# Altium PCB PCB.PcbDoc
Units mm, origin at the board's own origin, x right, y up, seen from the top; angles counter-clockwise.
Board outline 27.3 x 14 mm, 2 copper layers (Top Layer, Bottom Layer), stack 1.571 mm thick; 7 components, 7 nets, 32 pads, 9 vias.
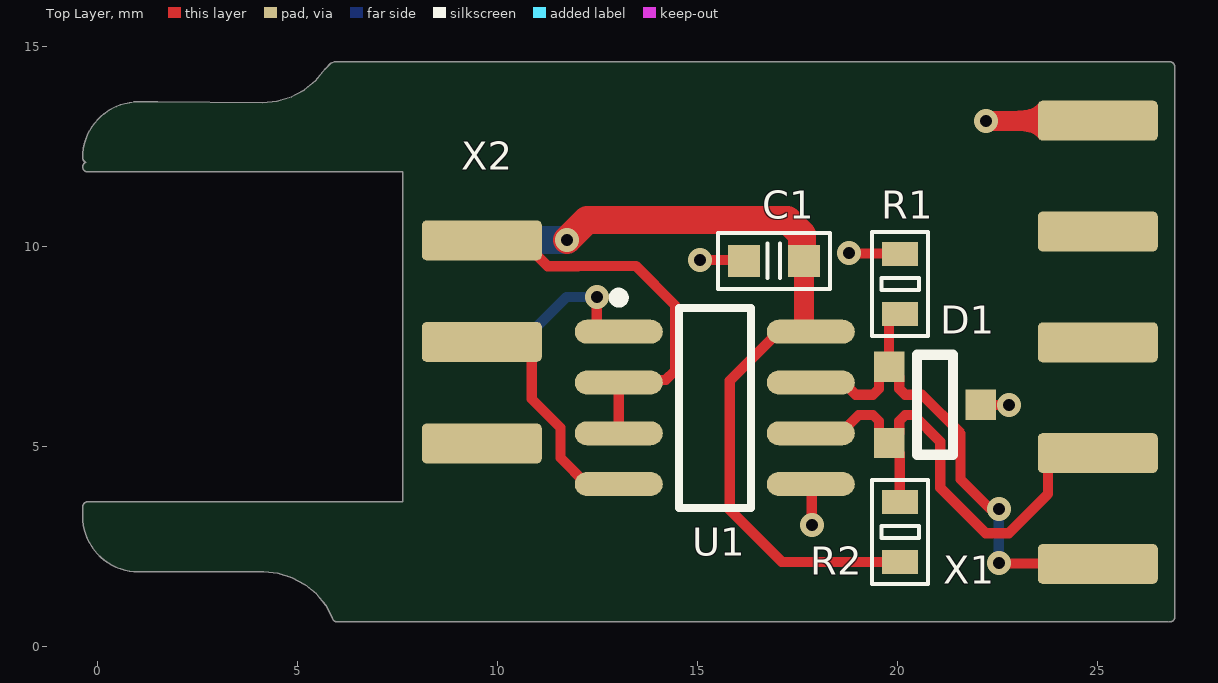
[diagram p0: Top Layer view]
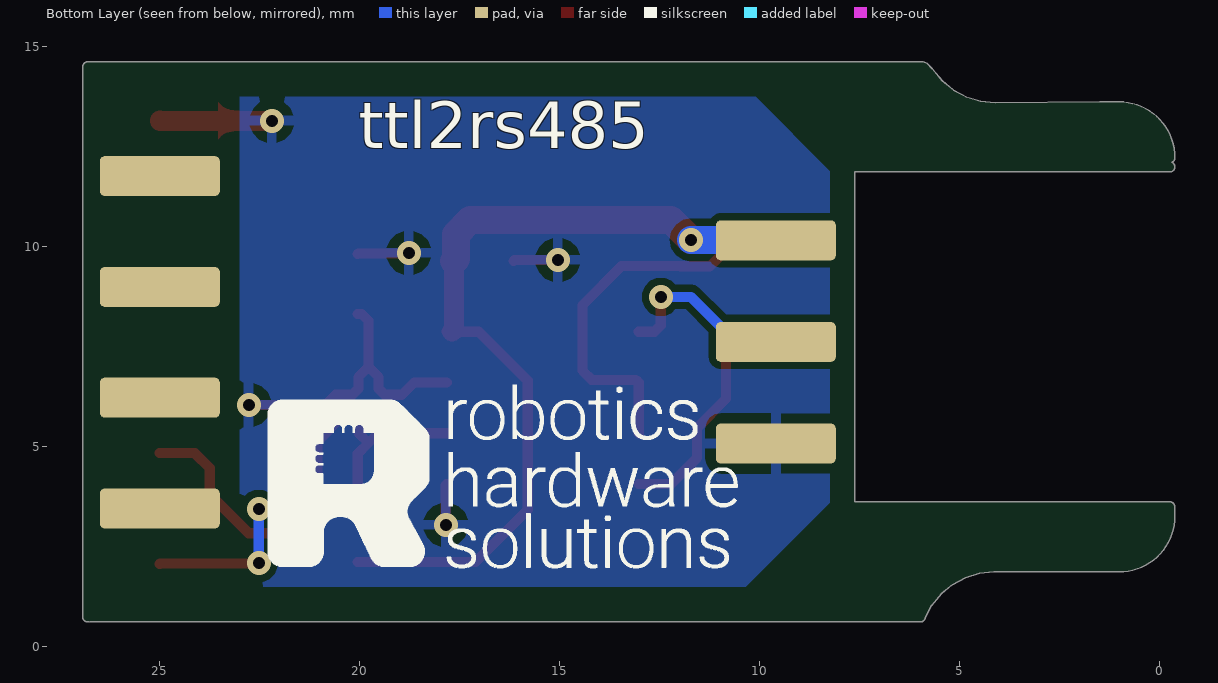
[diagram p1: Bottom Layer view, seen from below]

## Layer stack, top to bottom
Top Solder: solder mask 0.0102, Solder Resist, Dk 3.5
Top Layer: signal copper 0.0356
Dielectric 1: dielectric 1.5, FR-4, Dk 4.8
Bottom Layer: signal copper 0.0356
Bottom Solder: solder mask 0.0102, Solder Resist, Dk 3.5

## Board outline
-0.377,3.27 ccw(c1.02,3.27) 1.02,1.873 4.141,1.873 4.15,1.873 4.506,1.838 4.857,1.731 5.181,1.558 5.465,1.326 5.698,1.042 5.863,0.733 ccw(c5.989,0.75) 5.989,0.623 26.75,0.623 26.775,0.625 ccw(c26.8,0.75) 26.927,0.75 26.927,14.5 ccw(c26.8,14.5) 26.8,14.627 5.913,14.627 5.823,14.59 5.689,14.456 5.68,14.446 5.44,14.153 5.156,13.92 4.833,13.747 4.481,13.641 4.11,13.604 1.501,13.627 1.5,13.627 1.02,13.627 ccw(c1.02,12.23) -0.377,12.23 ccw(c-0.25,12.23) -0.305,12.115 ccw(c-0.25,12) -0.25,11.873 7.623,11.873 7.623,3.627 -0.25,3.627 ccw(c-0.25,3.5) -0.377,3.5

## Design rules (kind name [scope] priority, off if disabled: settings)
Clearance [All] p1: gap=0.18 ignorepadtopadclearanceinfootprint=FALSE
DiffPairsRouting [All] p1: maxlimit=0.254 minlimit=0.254 mostfreqgap=0.254 toplayer_minwidth=0.254 toplayer_maxwidth=0.381 toplayer_prefwidth=0.381 bottomlayer_minwidth=0.254 bottomlayer_maxwidth=0.381 bottomlayer_prefwidth=0.381 maxuncoupledlength=12.7
PolygonConnect [All] p1: connectstyle=Relief reliefconductorwidth=0.254 reliefentries=4 polygonreliefangle="90 Angle" airgapwidth=0.254
RoutingVias [All] p1: holewidth=0.3 width=0.6 viastyle="Through Hole" minholewidth=0.3 minwidth=0.6 maxholewidth=2 maxwidth=4
SolderMaskExpansion [All] p1: expansion=0.102 istentingtop=FALSE
Width [All] p1: maxlimit=2 minlimit=0.254 preferedwidth=0.254
29 further rules are at their usual default settings.

## Classes and differential pairs
differential pair RS485: +RS485_P -RS485_N

## Components (designator, comment, footprint, x,y, rotation, side; value= is the part's Value field where it differs from the comment)
C1 "0.1uF" C_0603 16.9,9.65 r0 top
D1 "SM712-02HTG" SOT23 19.783,7.002 r0 top
R1 "10k" R_0603 20.05,9.075 r90 top
R2 "10k" R_0603 20.05,2.875 r90 top
U1 "SN75176BDR" SO-8 15.425,5.975 r0 top
X1 "DB9" DB9_template 25,7.61 r90 top
X2 "PBD-6" PBD-6-sideways 9.975,5.085 r90 top

## Footprints (in the part's own frame and the unit in brackets; to place one, negate y for a bottom-side part, rotate by r counter-clockwise, add the part's x,y. Pads: shape width x height; smd on the part's side, far side on the other; paste and mask are expansions set on the pad)
C_0603 [mm] "Chip Capacitor; Body 1.6 x 0.8 mm (LxW typ)"
  rect 0.8x0.8 smd: 1(-0.75,0) 2(0.75,0)
  silkscreen extent -1.4,-0.7 1.4,0.7, body extent -0.8,-0.4 0.8,0.4, height 0.3
DB9_template [mm]
  rrect25% 1x3 smd: 1(-5.535,0) 2(-2.765,0) 3(0.005,0) 4(2.775,0) 5(5.545,0)
  rrect25% 1x3 smd far side: 6(-4.15,0) 7(-1.38,0) 8(1.39,0) 9(4.16,0)
  body extent -14.97,-14.1 15.03,1.2, height 5.75
PBD-6-sideways [mm] "Connector; Header; 3x2 Position"
  rrect25% 1x3 smd: 1(0,0.375) 3(2.54,0.375) 5(5.08,0.375)
  rrect25% 1x3 smd far side: 2(0,0.375) 4(2.54,0.375) 6(5.08,0.375)
  body extent -1.17,-1.25 6.52,10.4, height 1.97
R_0603 [mm]
  rect 0.6x0.9 smd: 1(-0.75,0) 2(0.75,0)
  silkscreen extent -1.3,-0.7 1.3,0.7, body extent -0.8,-0.41 0.8,0.41, height 0.45
SO-8 [mm] "SOIC, 8-Leads, Body 4.9x3.9mm, Pitch 1.27mm, IPC Medium Density"
  oval 2.2x0.6 smd: 1(-2.4,1.905) 2(-2.4,0.635) 3(-2.4,-0.635) 4(-2.4,-1.905) 5(2.4,-1.905) 6(2.4,-0.635) 7(2.4,0.635) 8(2.4,1.905)
  silkscreen extent -2.52,-2.5 0.9,2.88, body extent -3.17,-2.51 3.17,2.49, height 1.88
SOT23 [mil]
  rect 30x30 smd: 1(0,0) 2(0,-75) 3(90,-37.5)
  silkscreen extent 28,-87 63,12, body extent -4,-97 94,21, height 41

## Part data
C1: library part CAP_SMD, "Capacitor", Part Number=CC0603KPX7R9BB104
D1: library part ESD, "ESD", Part Number=SM712-02HTG
R1 R2: library part RES_SMD, "Resistor", Part Number=RC0603FR-0710KL
U1: "RS485 Half Duplex Convertor", Part Number=SN75176BDR
X1: library part DB9_template, "Connector"
X2: "Header, 6-Pin, Dual row", Part Number=PBD-6

## Via types
v1: diameter 0.6, hole 0.3, Top Layer to Bottom Layer, tented both sides, 9 vias

## Nets (pads, with @x,y where several pads share a name; then routed paths per layer and width w, separated by ;. In a path a pad name is that pad's centre, name@x,y a point inside that pad or via, vN(x,y) a via of type N, cw(c..) or ccw(c..) an arc to the next point about the centre after c; other vN are vias at no path point)
DE: U1.2 U1.3 X2.5 | length 9.9
  Top Layer w0.254: X2.5 10.6,10.165 11.247,9.518 11.997,9.518 12.004,9.525 13.45,9.525 14.432,8.543 14.432,6.907 14.201,6.676 13.091,6.676 U1.2 U1.3
GND: C1.1 D1.3 R1.2 U1.5 X1.5 X2.2 | length 6.9
  Top Layer w0.254: v1(15.05,9.675) 16.125,9.675 C1.1 ; U1.5 17.85,4.045 v1(17.85,3.05) ; v1(18.775,9.85) 18.787,9.838 20.037,9.838 R1.2 ; D1.3 v1(22.775,6.05)
  Top Layer w0.5: v1(22.2,13.15) 22.202,13.152 24.998,13.152 X1.5
RS485_N: D1.1 R1.1 U1.7 X1.1 | length 13
  Top Layer w0.254: U1.7 18.641,6.61 18.947,6.304 19.38,6.304 19.529,6.453 19.529,6.748 D1.1 ; R1.1 19.956,8.325 19.783,8.152 D1.1 ; v1@22.45,2.1 22.463,2.088 24.987,2.088 X1.1 ; v1(22.525,3.45) 22.517,3.458 22.3,3.458 21.571,4.187 21.571,5.339 20.606,6.304 20.185,6.304 20.037,6.453 20.037,6.748 D1.1
  Bottom Layer w0.254: v1(22.525,2.1) v1(22.525,3.45)
RS485_P: D1.2 R2.2 U1.6 X1.2 | length 13
  Top Layer w0.254: U1.6 18.566,5.34 19.022,5.796 19.38,5.796 19.529,5.647 19.529,5.351 D1.2 ; R2.2 20.05,4.83 D1.2 ; X1.2 24.125,4.845 23.752,4.472 23.752,3.819 22.776,2.843 22.197,2.843 21.063,3.976 21.063,5.129 20.396,5.796 20.185,5.796 20.037,5.647 20.037,5.351 D1.2
RXD: U1.1 X2.4 | length 4.8
  Top Layer w0.254: v1(12.475,8.75) 12.475,8.04 12.635,7.88 U1.1
  Bottom Layer w0.254: X2.4@9.725,7.5 X2.4 9.725,7.625 10.6,7.625 11.725,8.75 v1(12.475,8.75)
TXD: U1.4 X2.3 | length 6.1
  Top Layer w0.254: X2.3 X2.3@10.475,7.625 ; X2.3@10.6,7.625 X2.3@10.475,7.625 ; U1.4 12.225,4.07 11.566,4.729 11.566,5.48 10.848,6.198 10.848,7.252 X2.3@10.475,7.625
VCC5V: C1.2 R2.1 U1.8 X2.6 | length 21.8
  Top Layer w0.254: C1.2 C1.2@17.75,9.75 ; U1.8 17.696,7.88 17.025,7.88 15.8,6.655 15.8,3.425 17.1,2.125 R2.1
  Top Layer w0.5: C1.2 17.65,7.926 U1.8@17.696,7.88
  Top Layer w0.7: v1(11.725,10.175) 12.225,10.675 17.24,10.675 17.6,10.315 17.6,9.7 C1.2
  Bottom Layer w0.7: v1(11.725,10.175) X2.6@9.825,10.175 ; X2.6@9.825,10.175 9.61,10.175 X2.6 9.735,10.165 9.775,10.125 X2.6@9.825,10.175
pads on no net: X1.3 X1.4 X1.6 X1.7 X1.8 X1.9 X2.1

## Polygon pours and split planes (outlines as drawn)
GND on Bottom Layer "NONET_L-01_P-001" (solid, pour order 0): 10.103,13.75 23,13.75 23,1.5 10.353,1.5 8.25,3.603 8.25,11.897

## Silkscreen, mask and mechanical layers (free items; w line width, h text height)
Bottom Overlay:
  drawing of 28 lines, arcs and shapes, not listed
  text "ttl2rs485" at 20.024,12.082 h2
Board:
  lines w0.254: -0.25,12 7.75,12 7.75,3.5 -0.25,3.5 -0.25,3.27 ccw(c1.02,3.27) 1.02,2 1.5,2 4.141,2 ; -0.25,12.23 cw(c1.02,12.23) 1.02,13.5 1.5,13.5 4.116,13.477 4.506,13.515 4.881,13.629 5.227,13.814 5.53,14.063 5.779,14.366 5.913,14.5 26.8,14.5 26.8,0.75 ; 4.141,2.002 4.531,1.963 4.906,1.85 5.252,1.665 5.555,1.416 5.804,1.113 5.989,0.767 ; 5.989,0.75 26.75,0.75